# Altium PCB PATTERN-GENERATOR-NODE-PCB.PcbDoc (part 1 of 2)
Units mm, origin at the board's own origin, x right, y up, seen from the top; angles counter-clockwise.
Board outline 100.5 x 100.5 mm, 2 copper layers (Top Layer, Bottom Layer), stack 1.771 mm thick; 68 components, 36 nets, 239 pads, 2205 vias.
Unrouted connection lines stored in the file: 2.
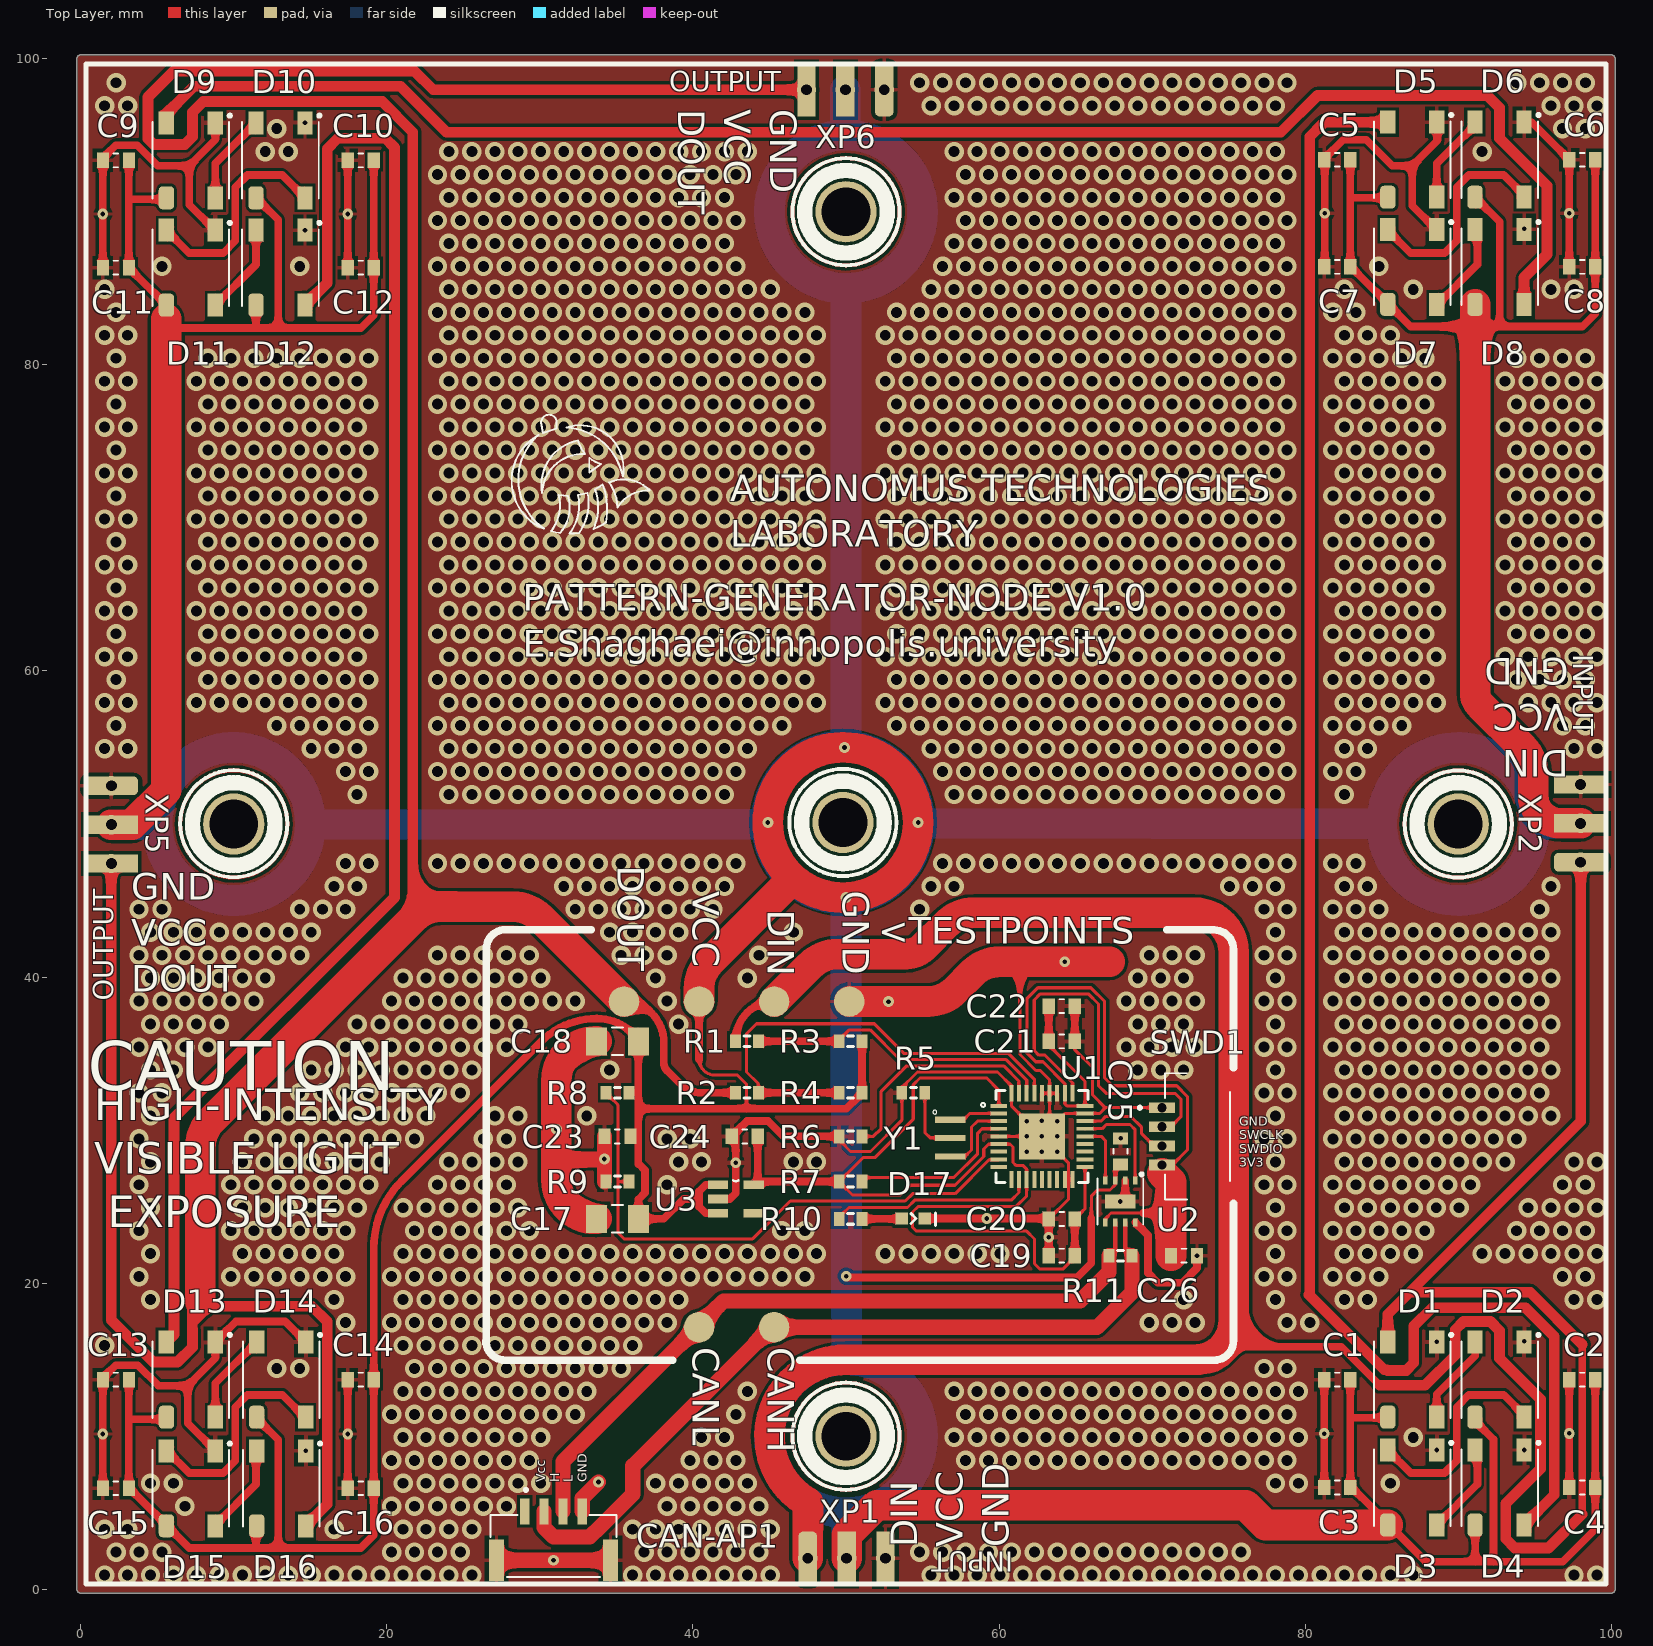
[diagram p0: Top Layer view]
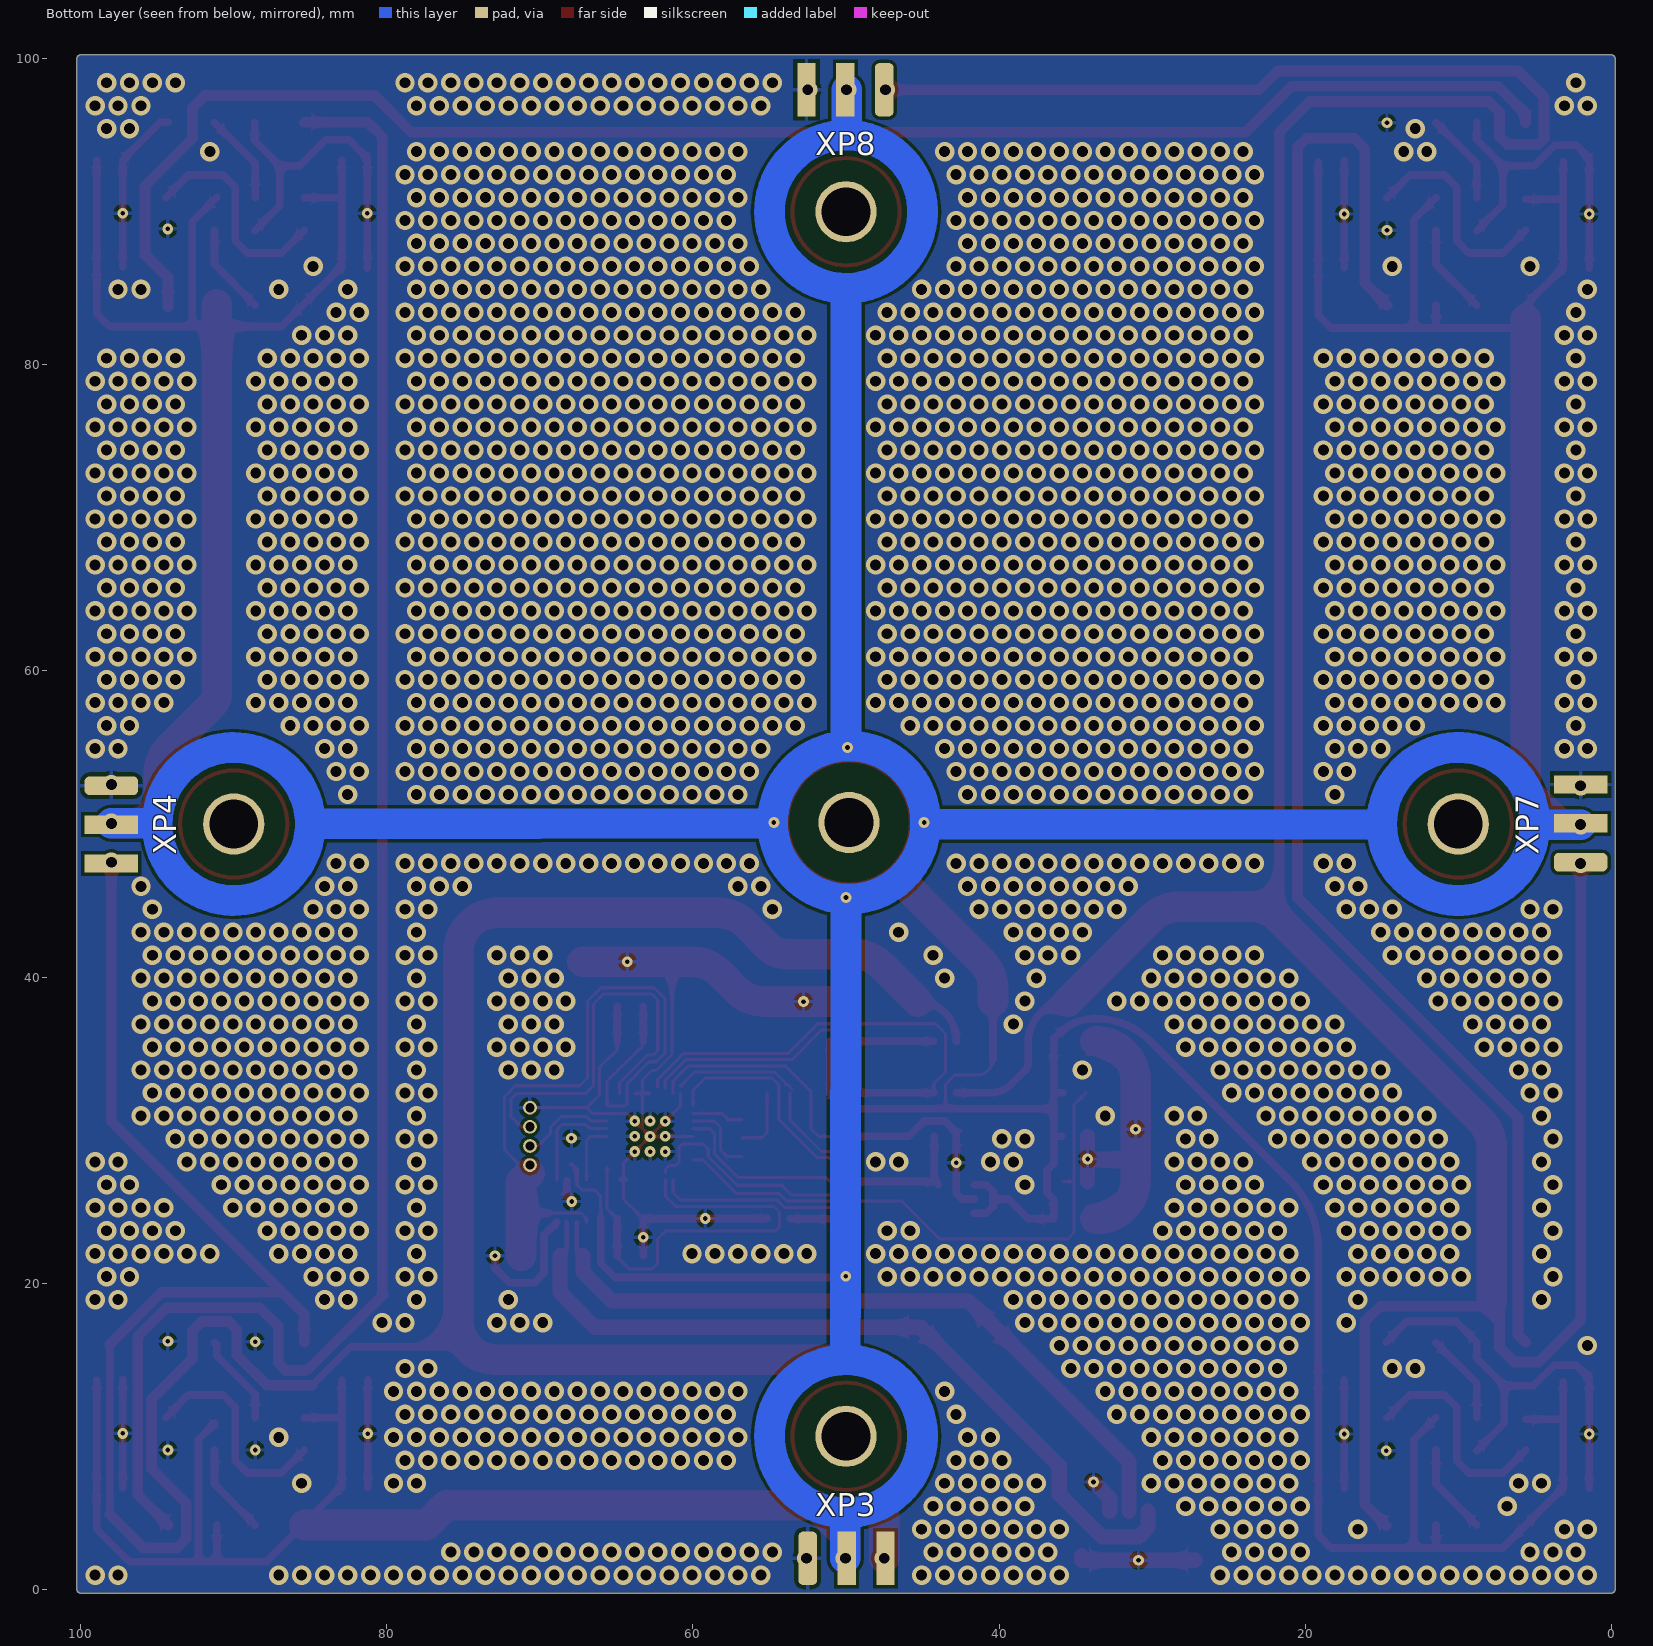
[diagram p1: Bottom Layer view, seen from below]
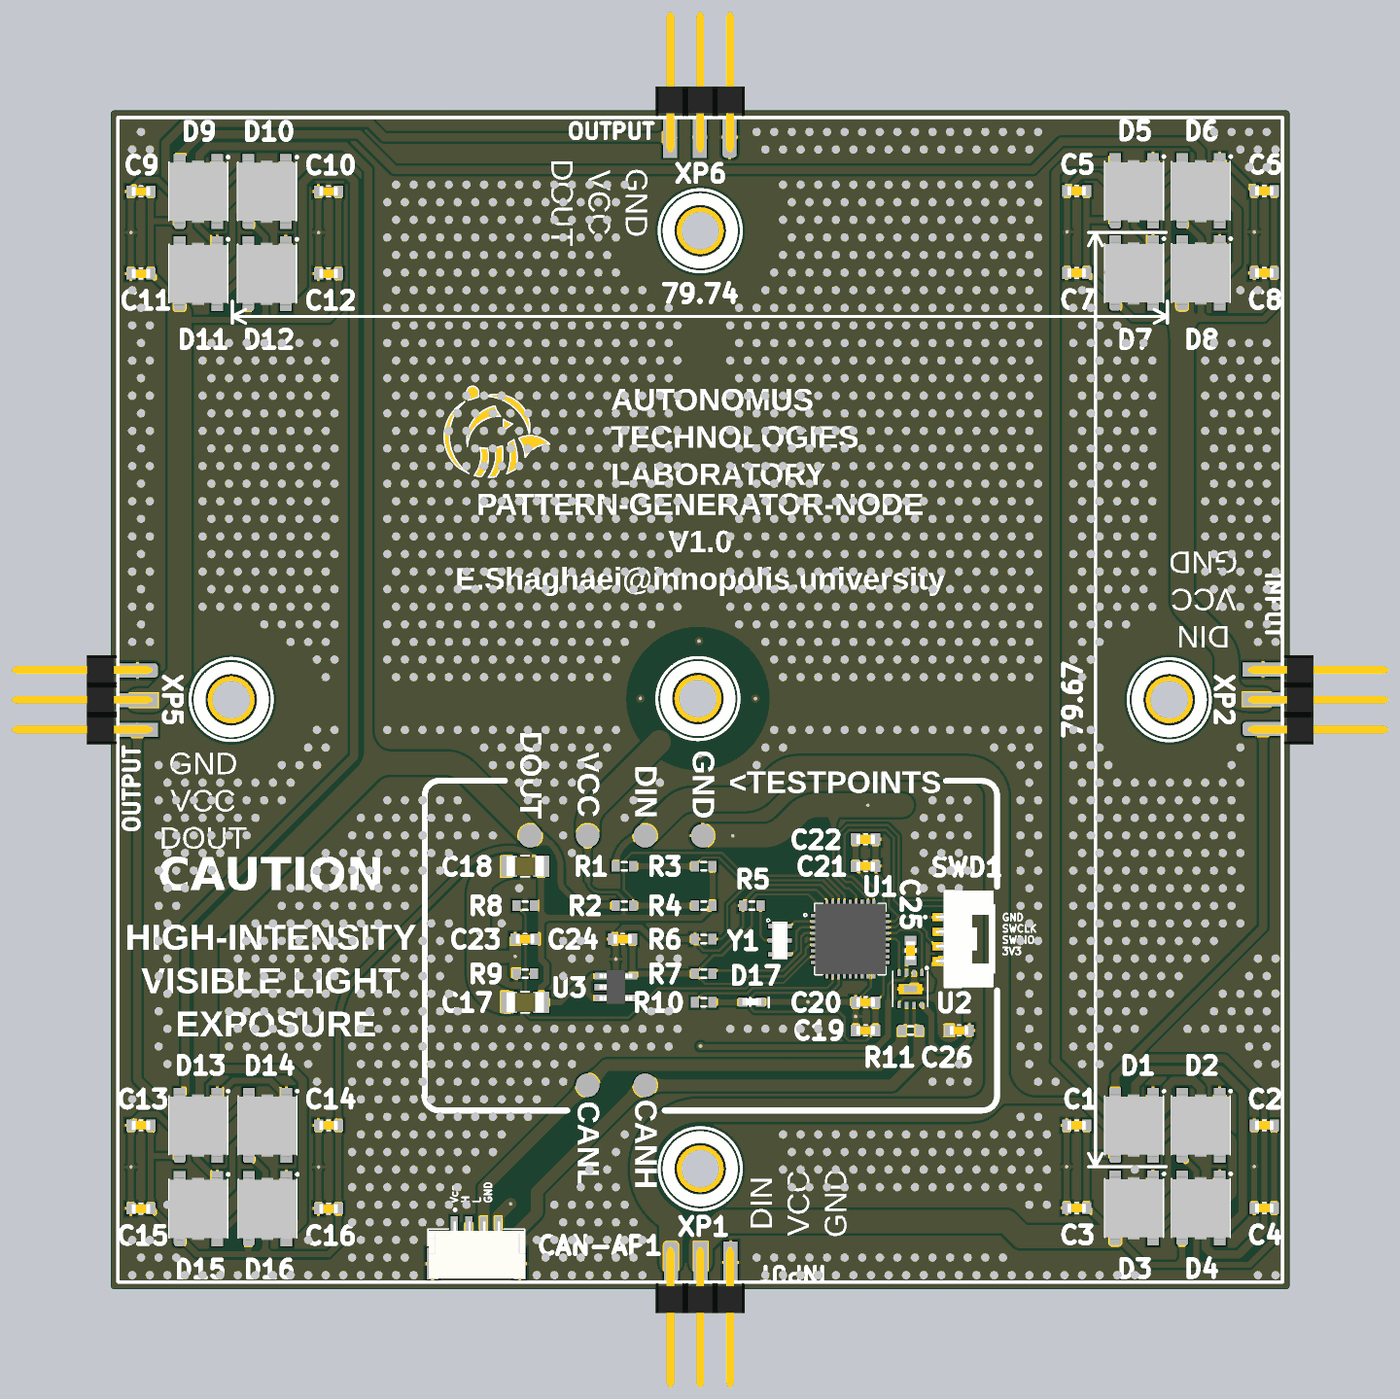
[diagram p3: 3D render of the assembled board from above, using the file's embedded part models]
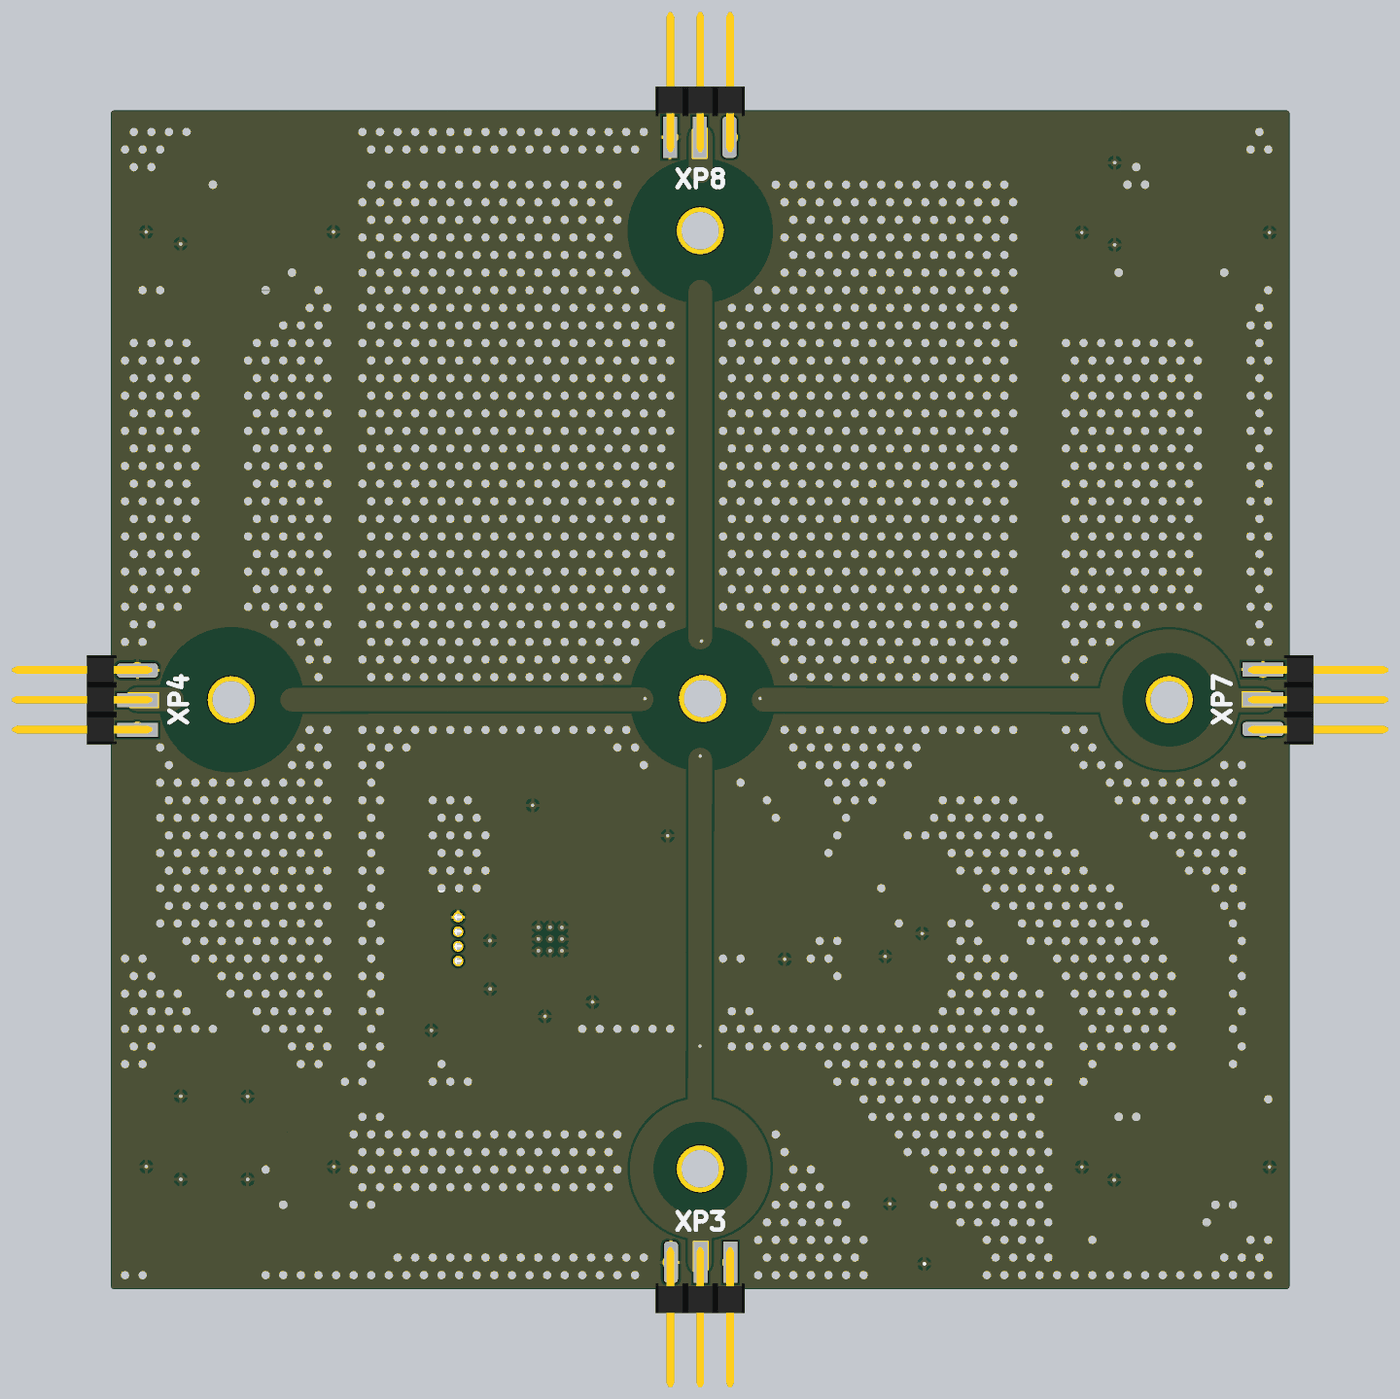
[diagram p4: 3D render of the assembled board from below, using the file's embedded part models]

## Layer stack, top to bottom
Top Solder: solder mask 0.0102, Solder Resist, Dk 3.5
Top Layer: signal copper 0.0356
Dielectric 1: dielectric 1.7, FR-4, Dk 4.8
Bottom Layer: signal copper 0.0356
Bottom Solder: solder mask 0.0102, Solder Resist, Dk 3.5

## Board outline
-0.25,0 ccw(c0,0) 0,-0.25 100,-0.25 ccw(c100,0) 100.25,0 100.25,100 ccw(c100,100) 100,100.25 0,100.25 ccw(c0,100) -0.25,100

## Design rules (kind name [scope] priority, off if disabled: settings)
Clearance [All] p1: gap=0.2 ignorepadtopadclearanceinfootprint=FALSE
PolygonConnect [All] p1: connectstyle=Relief reliefconductorwidth=0.254 reliefentries=4 polygonreliefangle="90 Angle" airgapwidth=0.254
RoutingVias [All] p1: holewidth=0.3 width=0.7 viastyle="Through Hole" minholewidth=0.3 minwidth=0.7 maxholewidth=1 maxwidth=1.5
SolderMaskExpansion [All] p1: expansion=0.102 istentingtop=FALSE
Width [All] p1: maxlimit=5 minlimit=0.17 preferedwidth=0.2
30 further rules are at their usual default settings.

## Components (designator, comment, footprint, x,y, rotation, side; value= is the part's Value field where it differs from the comment)
C1 "GX035C104MAT2-500" *CAPC1608X90 82.1,13.7 r180 top value=0.1u
C2 "GX035C104MAT2-500" *CAPC1608X90 98.1,13.7 r180 top value=0.1u
C3 "GX035C104MAT2-500" *CAPC1608X90 82.1,6.65 r180 top value=0.1u
C4 "GX035C104MAT2-500" *CAPC1608X90 98.1,6.65 r180 top value=0.1u
C5 "GX035C104MAT2-500" *CAPC1608X90 82.1,93.4 r180 top value=0.1u
C6 "GX035C104MAT2-500" *CAPC1608X90 98.1,93.4 r180 top value=0.1u
C7 "GX035C104MAT2-500" *CAPC1608X90 82.1,86.4 r180 top value=0.1u
C8 "GX035C104MAT2-500" *CAPC1608X90 98.1,86.4 r180 top value=0.1u
C9 "GX035C104MAT2-500" *CAPC1608X90 2.3,93.356 r180 top value=0.1u
C10 "GX035C104MAT2-500" *CAPC1608X90 18.3,93.356 r180 top value=0.1u
C11 "GX035C104MAT2-500" *CAPC1608X90 2.3,86.35 r180 top value=0.1u
C12 "GX035C104MAT2-500" *CAPC1608X90 18.3,86.35 r180 top value=0.1u
C13 "GX035C104MAT2-500" *CAPC1608X90 2.3,13.7 r180 top value=0.1u
C14 "GX035C104MAT2-500" *CAPC1608X90 18.3,13.7 r180 top value=0.1u
C15 "GX035C104MAT2-500" *CAPC1608X90 2.3,6.6 r180 top value=0.1u
C16 "GX035C104MAT2-500" *CAPC1608X90 18.3,6.6 r180 top value=0.1u
C17 "GRM31CR61A476KE15L" *CAPC3216X125N 35.069,24.2 r0 top value=47u
C18 "GRM31CR61A476KE15L" *CAPC3216X125N 35.069,35.8 r0 top value=47u
C19 "GX035C104MAT2-500" *CAPC1608X90 64.1,21.8 r180 top value=0.1u
C20 "GX035C104MAT2-500" *CAPC1608X90 64.1,24.2 r180 top value=0.1u
C21 "GX035C104MAT2-500" *CAPC1608X90 64.1,35.8 r0 top value=0.1u
C22 "GX035C104MAT2-500" *CAPC1608X90 64.1,38.1 r0 top value=0.1u
C23 "GX035C104MAT2-500" *CAPC1608X90 35.069,29.59 r180 top value=0.1u
C24 "GX035C104MAT2-500" *CAPC1608X90 43.379,29.59 r180 top value=0.1u
C25 "GX035C104MAT2-500" *CAPC1608X90 67.937,28.61 r90 top value=0.1u
C26 "GX035C104MAT2-500" *CAPC1608X90 72.082,21.8 r0 top value=0.1u
CAN-AP1 "SM04B-GHS-TB(LF)(SN)-" JST_SM04B-GHS-TB(LF)(SN)- 30.89,2.82 r0 top
D1 "WS2812" LED_WS2812 87,13.7 r90 top
D2 "WS2812" LED_WS2812 92.7,13.7 r90 top
D3 "WS2812" LED_WS2812 87,6.65 r90 top
D4 "WS2812" LED_WS2812 92.7,6.65 r90 top
D5 "WS2812" LED_WS2812 87,93.4 r90 top
D6 "WS2812" LED_WS2812 92.7,93.4 r90 top
D7 "WS2812" LED_WS2812 87,86.4 r90 top
D8 "WS2812" LED_WS2812 92.7,86.4 r90 top
D9 "WS2812" LED_WS2812 7.2,93.356 r90 top
D10 "WS2812" LED_WS2812 13.053,93.356 r90 top
D11 "WS2812" LED_WS2812 7.2,86.35 r90 top
D12 "WS2812" LED_WS2812 13.053,86.35 r90 top
D13 "WS2812" LED_WS2812 7.2,13.7 r90 top
D14 "WS2812" LED_WS2812 13.1,13.7 r90 top
D15 "WS2812" LED_WS2812 7.2,6.6 r90 top
D16 "WS2812" LED_WS2812 13.1,6.6 r90 top
D17 "0603-LED-BLUE" *LEDM1608X80_LTE-C1906R-14(Primary) 54.4,24.224 r180 top
R1 "Res3" J1-0603 43.529,35.8 r180 top value=330
R2 "Res3" J1-0603 43.529,32.44 r180 top value=330
R3 "Res3" J1-0603 50.3,35.8 r0 top value=10K
R4 "Res3" J1-0603 50.3,32.44 r0 top value=10K
R5 "RC0603FR-0710KL" J1-0603 54.4,32.44 r0 top value=0R
R6 "RC0603FR-0710KL" J1-0603 50.3,29.59 r0 top value=10k
R7 "RC0603FR-0710KL" J1-0603 50.3,26.64 r0 top value=10k
R8 "RC0603FR-0710KL" J1-0603 35.069,32.44 r0 top value=10k
R9 "RC0603FR-0710KL" J1-0603 35.069,26.64 r0 top value=10k
R10 "Res3" J1-0603 50.3,24.2 r0 top value=330
R11 "Res3" J1-0603 67.937,21.8 r0 top value=120
SWD1 "BM04B-GHS-TBT(LF)(SN)(N)" JST_BM04B-GHS-holes 74,29.59 r90 top
U1 "STM32F103T8" *QFN50P600X600X100-37N 62.8,29.59 r0 top
U2 "TJA1042" SOT782-1 67.92,25.334 r180 top
U3 "SPX3819M5-L-3-3/TR" *SOT95P280X145-5N 42.8,25.5 r0 top value=3V3
XP1 "Header 3" "HDR Side 3 pin" 50.04,2.028 r0 top
XP2 "Header 3" "HDR Side 3 pin" 97.998,50.04 r90 top
XP3 "Header 3" "HDR Side 3 pin" 49.96,2.028 r180 bottom
XP4 "Header 3" "HDR Side 3 pin" 97.998,49.96 r270 bottom
XP5 "Header 3" "HDR Side 3 pin" 2.002,49.96 r270 top
XP6 "Header 3" "HDR Side 3 pin" 49.96,97.972 r180 top
XP7 "Header 3" "HDR Side 3 pin" 2.002,50.04 r90 bottom
XP8 "Header 3" "HDR Side 3 pin" 50.04,97.972 r0 bottom
Y1 "CSTCE8M00G55-R0" *OSC_CSTCE8M00G55-R0 56.8,29.477 r270 top

## Footprints (in the part's own frame and the unit in brackets; to place one, negate y for a bottom-side part, rotate by r counter-clockwise, add the part's x,y. Pads: shape width x height; smd on the part's side, far side on the other; paste and mask are expansions set on the pad)
*CAPC1608X90 [mm]
  rect 0.8x1 smd: 1(-0.85,0) 2(0.85,0)
  silkscreen extent -0.15,-0.45 0.15,0.45, body extent -0.8,-0.4 0.8,0.41, height 0.88
*CAPC3216X125N [mm]
  rect 1.38x1.82 smd: 1(-1.369,0) 2(1.369,0)
  silkscreen extent -0.36,-0.9 0.36,0.9, body extent -1.6,-0.87 1.6,0.87, height 1.71
*LEDM1608X80_LTE-C1906R-14(Primary) [mm]
  rect 0.8x0.8 smd: A(0.75,0) C(-0.75,0)
  silkscreen extent -1.45,-0.38 0.16,0.45, body extent -0.8,-0.3 0.8,0.3, height 1.15
*OSC_CSTCE8M00G55-R0 [mm]
  rect 0.4x2 smd: 1(-1.2,0) 2(0,0) 3(1.2,0)
  silkscreen extent -1.83,-1.13 -1.57,-0.87, body extent -1.6,-0.65 1.6,0.65, height 1
*QFN50P600X600X100-37N [mm]
  rect 1.08x0.26 smd: 1(-2.815,2) 2(-2.815,1.5) 3(-2.815,1) 4(-2.815,0.5) 5(-2.815,0) 6(-2.815,-0.5) 7(-2.815,-1) 8(-2.815,-1.5) 9(-2.815,-2) 19(2.815,-2) 20(2.815,-1.5) 21(2.815,-1) 22(2.815,-0.5) 23(2.815,0) 24(2.815,0.5) 25(2.815,1) 26(2.815,1.5) 27(2.815,2)
  rect 0.26x1.08 smd: 10(-2,-2.815) 11(-1.5,-2.815) 12(-1,-2.815) 13(-0.5,-2.815) 14(0,-2.815) 15(0.5,-2.815) 16(1,-2.815) 17(1.5,-2.815) 18(2,-2.815) 28(2,2.815) 29(1.5,2.815) 30(1,2.815) 31(0.5,2.815) 32(0,2.815) 33(-0.5,2.815) 34(-1,2.815) 35(-1.5,2.815) 36(-2,2.815)
  rect 3x3 smd: ""(0,0)
  silkscreen extent -3.97,-3 3,3, body extent -3,-3 3,3, height 1
*SOT95P280X145-5N [mil]
  rect 52x22 smd: 1(-46,37) 2(-46,0) 3(-46,-37) 4(46,-37) 5(46,37)
  silkscreen extent -7,46 7,48, body extent -55,-57 55,57, height 57
"HDR Side 3 pin" [mm]
  rrect50% 1.2x3.5 smd: 1(-2.54,0)
  rect 1.2x3.5 smd: 2(0,0) 3(2.54,0)
  body extent -3.85,-10.67 3.77,1.27, height 1.57
J1-0603 [mm] "Chip Resistor, Body 1.6x0.8mm, IPC High Density"
  rect 0.7x0.9 smd: 1(-0.75,0) 2(0.75,0)
  silkscreen extent -0.2,-0.35 0.2,0.35, body extent -0.85,-0.48 0.85,0.48, height 0.9
JST_BM04B-GHS-holes [mm]
  rect 0.7x1.7 / inner rect 0.6x1.7 / far side round 0.9 hole 0.6: 1(1.875,3.35) 2(0.625,3.35) 3(-0.625,3.35) 4(-1.875,3.35)
  silkscreen extent -4.13,-1.1 4.13,4.9, body extent -4.12,-1.02 4.12,3.93, height 4.15
JST_SM04B-GHS-TB(LF)(SN)- [mm]
  rect 0.6x1.7 smd: 1(-1.875,2.275) 2(-0.625,2.275) 3(0.625,2.275) 4(1.875,2.275)
  rect 1x2.7 smd: SH1(-3.725,-0.925) SH2(3.725,-0.925)
  silkscreen extent -4.13,-2.02 4.13,3.77, body extent -4.06,-2.16 4.19,2.69, height 4.35
LED_WS2812 [mm]
  rrect50% 1.5x1 smd: 1(-2.45,1.6)
  rect 1.5x1 smd: 2(-2.45,-1.6) 3(2.45,-1.6) 4(2.45,1.6)
  silkscreen extent -2.5,-2.64 3.02,2.5, body extent -2.7,-2.45 2.65,2.5, height 1.5
SOT782-1 [mm]
  rect 0.3x0.525 smd: 1(-0.975,-1.362) 2(-0.325,-1.362) 3(0.325,-1.362) 4(0.975,-1.362) 5(0.975,1.362) 6(0.325,1.362) 7(-0.325,1.362) 8(-0.975,1.362)
  rect 2x0.9 smd paste-2: P$9(0,0)
  silkscreen extent -1.5,-1.88 1.5,1.5, body extent -1.52,-1.52 1.52,1.52, height 0.85

## Part data
C1 C2 C3 C4 C5 C6 C7 C8 C9 C10 C11 C12 C13 C14 C15 C16 C19 C20 C21 C22 C23 C24 C25 C26: "Cap Thin Film 0.1uf 50v 0603", Package="0603 AVX", MF=AVX, Pacage Metric=1608, SnapEDA_Link=https://www.snapeda.com/parts/GX035C104MAT2-500/AVX/view-part/?ref=snap, Type=SMD
  C1 C2 C3 C4 C5 C6 C7 C8 C9 C10 C11 C12 C13 C14 C15 C16 C19 C20 C21 C22 C25 C26: MP="GX035C104MAT2-500 or CL10B104JB8NNNC"
  C23 C24: MP=GX035C104MAT2-500
C17 C18: "Multilayer Ceramic Capacitor, GRM Series, 47 - F, - 10%, X5R, 10 V, 1206 [3216 Metric]", Package="1206 Murata Electronics", MF="Murata Electronics", MP=GRM31CR61A476KE15L, SnapEDA_Link=https://www.snapeda.com/parts/GRM31CR61A476KE15L/Murata%20Electronics%20North%20America/view-part/?ref=snap, Type=SMD
CAN-AP1: "Connector Header Surface Mount, Right Angle 4 position 0.049 _1.25mm_", Package=None, ChipDip_Link=https://www.chipdip.ru/product/sm04b-ghs-tb-lf-sn-gh-1.25mm-header-side-ent, HelpURL=http://www.farnell.com/datasheets/2082975.pdf, MF="JST Sales", MP=SM04B-GHS-TB(LF)(SN), SnapEDA_Link=https://www.snapeda.com/parts/SM04B-GHS-TB%28LF%29%28SN%29-/JST%20Sales%20America%20Inc./view-part/2759740/?ref=snap, System=Connector
D1 D2 D3 D4 D5 D6 D7 D8 D9 D10 D11 D12 D13 D14 D15 D16: "Addressable Lighting - 5 LED Discrete Serial _Shift Register_ Red, Green, Blue _RGB_ 5.00mm Dia", Package="SparkFun Electronics", Availability=Unavailable, ChipDip_Link=https://www.chipdip.ru/product/ws2812b, HelpURL=https://static.chipdip.ru/lib/554/DOC001554925.pdf, MF="SparkFun Electronics", MP=WS2812, Price=None, SnapEDA_Link=https://www.snapeda.com/parts/WS2812/SparkFun%20Electronics/view-part/106391/?ref=snap
D17: library part LTE-C1906R-14, "LED IrLED Chip LED 2-Pin SMD T/R", Package="0603 Lite-On", MP=0603-LED-BLUE, SnapEDA_Link=https://www.snapeda.com/parts/LTE-C1906R-14/Lite-On%20Inc./view-part/?ref=snap, Type=SMD
R1 R2 R3 R4 R10: "Resistor", Package=R0603, Pacage Metric=1608, Type=SMD
  R1 R2 R3 R4: ChipDip_Link=https://www.chipdip.ru/product0/9000079736, HelpURL=https://www.chipdip.ru/product0/9000079736, MP="4.7K 1% 0603"
  R10: ChipDip_Link=https://www.chipdip.ru/product0/9000079628, HelpURL=https://www.chipdip.ru/product0/9000079628, MP=RC0603FR-07330RL
R5 R6 R7 R8 R9: "10 kOhms 1 0.1 W 1 10 W Chip Resistor 0603 1608 Metric Thick Film", Package=R0603, ChipDip_Link=https://www.chipdip.ru/product0/9000079736, HelpURL=https://www.chipdip.ru/product0/9000079736, MF="Yageo or NXP", MP="10K 1% 0603", Pacage Metric=1608, SnapEDA_Link=https://www.snapeda.com/parts/RC0603FR-0710KL/Yageo/view-part/?ref=dk&t=RC0603FR-0710KL&con_ref=None, Type=SMD
R11: "120 Ohms 1 0.1 W 1 10 W Chip Resistor 0603 1608 Metric Thick Film", Package=R0603, ChipDip_Link=https://www.chipdip.ru/product0/9000079618, HelpURL=https://www.chipdip.ru/product0/9000079618, MP=RC0603FR-07120RL, Pacage Metric=1608, Type=SMD
SWD1: "Conn Shrouded Header HDR 4 POS 1.25mm Solder ST SMD Reel", Package=None, Instructions="Do not install", MF="JST Sales", MP=SM04B-GHS-TB(LF)(SN), SnapEDA_Link=https://www.snapeda.com/parts/BM04B-GHS-TBT%28LF%29%28SN%29%28N%29/JST%20Sales%20America%20Inc./view-part/?ref=snap, System=Connector, Type=SMD
U1: "STM32F103T8U6, Микроконтроллер 32BIT ARM 64K FLASH [VFQFPN-36]", Package=VFQFPN-36, ChipDip_Link=https://www.chipdip.ru/product/stm32f103t8u6-2, HelpURL=http://www.st.com/stonline/products/literature/ds/13587.pdf, MF=STM, MP=STM32F103T8U6, SnapEDA_Link=https://www.snapeda.com/parts/STM32F103T8U6TR/STMicroelectronics/view-part/?ref=search&t=STM32F103T8U6, Type=SMD
U2: "1/1 Transceiver Half CANbus 8-SO", Package="VDFN-8 NXP USA", ChipDip_Link=https://www.chipdip.ru/product1/8002840332, HelpURL=https://static.chipdip.ru/lib/583/DOC001583059.pdf, MF="NXP USA", MP=TJA1042, SnapEDA_Link=https://www.snapeda.com/parts/TJA1042/NXP%20USA%20Inc./view-part/900919/?ref=snap, Type=SMD
U3: library part SPX3819M5-L, "Low Dropout Voltage Regulator, Adjustable 0.5A, В±1%, 2.5 to 16 Vin, 5-Pin SOT-23", Package="SOT-23-5 Exar", ChipDip_Link=https://www.chipdip.ru/product1/8003455237, HelpURL=http://www.farnell.com/datasheets/2614478.pdf, MF="MaxLinear, Inc.", MP=SPX3819M5-L-3-3/TR, SnapEDA_Link=https://www.snapeda.com/parts/SPX3819M5-L/MaxLinear%2C%20Inc./view-part/?ref=snap, Type=SMD
XP1 XP2 XP3 XP4 XP5 XP6 XP7 XP8: "Header, 3-Pin", LatestRevisionDate=17-Jul-2002, LatestRevisionNote="Re-released for DXP Platform.", Publisher="Altium Limited"
Y1: "Ceramic Resonator 8MHz ??0.5% _Tol_ ??0.2% _Stability_ 33pF 40Ohm 3-Pin CSMD T/R", Package="SMD-3 Murata", ChipDip_Link=https://www.chipdip.ru/product1/8001783721, HelpURL=https://www.murata.com/en-eu/api/pdfdownloadapi?cate=&partno=CSTCE8M00G55-R0, MF=Murata, MP=CSTCE8M00G55-R0, SnapEDA_Link=https://www.snapeda.com/parts/CSTCE8M00G55-R0/Murata%20Electronics%20North%20America/view-part/?ref=snap, Type=SMD

## Free pads (board coordinates)
  round 2 smd: 5(45.3,38.4) 6(35.498,38.4) 8(40.399,38.4) 9(50.21,38.4) 10(45.3,17.12) 11(40.399,17.12)
  round 4 hole 3.2: ""(10,50) ""(49.8,50.1) ""(50,10) ""(50,90) ""(90,50)

## Via types
v1: diameter 1.27, hole 0.711, Top Layer to Bottom Layer, tented both sides, 2151 vias
v2: diameter 0.7, hole 0.3, Top Layer to Bottom Layer, tented top, 42 vias
v3: diameter 1.27, hole 0.711, Top Layer to Bottom Layer, tented top, 12 vias

## Nets (pads, with @x,y where several pads share a name; then routed paths per layer and width w, separated by ;. In a path a pad name is that pad's centre, name@x,y a point inside that pad or via, vN(x,y) a via of type N, cw(c..) or ccw(c..) an arc to the next point about the centre after c; other vN are vias at no path point)
3.3: C19.1 C20.1 C21.1 C22.1 C24.1 C26.1 R7.1 SWD1.4 U1.1 U1.6 U1.12 U1.19 U1.27 U1.29 U2.5 U3.5 | length 119.2
  Top Layer w0.2: U1.1@59.985,31.59 59.985,32.615 59.2,33.4 54.833,33.4 54.395,32.962 54.395,30.716 51.879,28.2 51.11,28.2 R7.1@49.55,26.64 50.423,25.767 53.567,25.767 54.2,26.4 57.117,26.4 59,28.283 59,28.764 59.326,29.09 U1.6@59.985,29.09 60.718,29.09 60.915,28.893 60.915,27.885 61.1,27.7 61.548,27.7 61.804,27.444 U1.12@61.804,27.226 ; U1.12@61.8,26.775 61.8,25.7 61.1,25 54.7,25 54.35,24.65 54.35,23.65 54.6,23.4 61.8,23.4 62.312,22.888 62.312,21.278 62.67,20.92 64.166,20.92 64.95,21.703 C19.1@64.95,21.8 ; C21.1@63.25,35.8 63.25,35.55 65.615,33.185 U1.27@65.615,31.59 65.605,31.6 65.57,31.565 64.459,31.565 64.3,31.724 U1.29@64.3,32.405 64.3,33.034 62.9,34.434 62.867,34.467 62.399,34.467 61.818,35.047 61.818,38.584 62.534,39.3 66,39.3 66.9,38.4 66.9,33.4 67.4,32.9 71.6,32.9 72.3,32.2 72.3,28.7 71.315,27.715 SWD1.4@70.65,27.715 SWD1.4@70.525,27.59 ; C20.1@64.95,24.2 65.615,24.865 U1.19@65.615,27.59 ; U2.5@66.945,23.972 66.945,24.216 67.313,24.584 69.42,24.584
  Top Layer w0.5: U3.5@43.968,26.44 U3.5@44.169,26.64 ; C24.1@44.229,29.59 44.229,26.7 U3.5@44.169,26.64 ; R7.1@49.55,26.64 U3.5@44.169,26.64 ; C21.1@63.25,35.8 C22.1@63.25,38.1 ; C19.1@64.95,21.8 C20.1@64.95,24.2 ; 69.42,24.584 69.426,24.579 71.232,24.579
  Top Layer w2: 70.65,27.19 71.232,26.608 71.232,24.579 C26.1@71.232,21.8
ADC_5V: R8.1 R9.2 U1.8 | length 37.4
  Top Layer w0.2: R8.1@34.319,32.44 35.041,31.718 cw(c34.899,31.577) 35.099,31.578 35.1,27.03 35.1,26.813 cw(c34.319,26.64) 35.1,26.467 35.1,26.219 35.101,23.383 ccw(c35.301,23.382) 35.159,23.241 35.5,22.9 43.9,22.9 46.367,25.367 53.867,25.367 54.353,25.853 57.135,25.853 59.343,28.06 59.955,28.06 U1.8@59.985,28.09 ; 35.119,26.619 cw(c35.209,26.44) 35.209,26.64 R9.2@35.819,26.64
BOOT0: R6.2 U1.35 | length 14.8
  Top Layer w0.2: R6.2@51.05,29.59 51.79,29.59 52.3,30.1 52.3,32.534 53.966,34.2 60.3,34.2 61.3,33.2 U1.35@61.3,32.405
CAN_H: CAN-AP1.2 pad.10 R11.2 U2.7 | length 52.2
  Top Layer w0.3: U2.7@68.245,23.972 68.245,22.242 R11.2@68.687,21.8
  Top Layer w1: CAN-AP1.2@30.265,5.095 30.265,4.04 30.89,3.415 33.25,3.415 33.962,4.108 36.07,6.216 36.07,8.07 45.12,17.12 66.4,17.12 68.687,19.407 R11.2@68.687,21.8
CAN_L: CAN-AP1.3 pad.11 R11.1 U2.6 | length 47.5
  Top Layer w0.3: R11.1@67.187,21.8 67.595,22.208 U2.6@67.595,23.972
  Top Layer w1: CAN-AP1.3@31.515,5.095 31.515,8.355 40.34,17.18 41.993,18.833 65.303,18.833 67.187,20.717 R11.1@67.187,21.8
CAN_RXD: U1.23 U2.4 | length 4.1
  Top Layer w0.2: U1.23@65.615,29.59 66.679,29.59 66.945,29.324 U2.4@66.945,26.697
CAN_TXD: U1.24 U2.1 | length 6.9
  Top Layer w0.2: U1.24@65.615,30.09 65.621,30.096 66.737,30.096 67.013,30.372 68.553,30.372 68.895,30.031 U2.1@68.895,26.697
DIN: D1.4 pad.5 R1.2 XP1.1 XP2.1 XP3.3 XP4.3 | length 208.7
  Top Layer w0.5: R1.2@42.779,35.8 cw(c45.468,35.8) 43.567,37.702 cw(c45.252,36.016) 45.252,38.4 pad.5@45.3,38.4 ; 75.254,15.837 82.351,15.837 84.863,13.325 ; 98.1,4.9 98.1,16
  Top Layer w0.7: 84.863,13.325 87.823,13.325 89.8,15.301 89.8,16.953 90.347,17.5 92.1,17.5 92.7,16.9 92.7,15.1 95.378,12.422 95.378,7.878 93.1,5.6 93.1,3.3 93.7,2.7 95.9,2.7 98.1,4.9 ; D1.4@85.4,16.15 85.4,17.973 98,30.573 98,47.499 v3(97.998,47.5) ; 86.9,19.4 94.7,19.4 98.1,16
  Top Layer w2: pad.5@45.3,38.4 47.656,40.756 cw(c49.452,38.96) 49.452,41.5 53.893,41.5 ccw(c53.893,43.207) 55.1,42 56.556,43.456 cw(c58.352,41.66) 58.352,44.2 72.78,44.2 cw(c72.78,41.66) 75.32,41.66 75.32,17.54 cw(c72.78,17.54) 72.78,15 50.04,15 ccw(c50,10) 49.971,15 ccw(c50,10) 47.536,5.649 ; v3(47.5,2.028) 47.515,5.612
DOUT: D16.2 pad.6 R2.2 XP5.3 XP6.3 XP7.1 XP8.1 | length 240.1
  Top Layer w0.5: pad.6@35.498,38.4 cw(c35.498,35.861) 37.293,37.656 cw(c35.345,35.708) 38.1,35.708 38.1,34.383 ccw(c38.783,34.383) 38.3,33.9 39.2,33 ccw(c40.552,34.352) 40.552,32.44 R2.2@42.779,32.44
  Top Layer w0.7: v3(2.002,47.42) 2.002,17.598 4.75,14.85 6.328,14.85 7.3,15.822 7.3,17 ; 7.294,17 7.294,17.429 ; 7.294,18.591 7.294,17.429 ; D16.2@14.7,4.15 16.1,5.55 16.1,17.5 15.1,18.5 8.365,18.5 7.294,17.429 ; 20.868,43.86 20.956,43.948 ccw(c19.16,45.744) 21.7,45.744 21.7,95.2 19.7,97.2 8,97.2 7.3,96.5 7.3,94.9 6.8,94.4 4.774,94.4 4.4,94.774 4.4,97.5 6.1,99.2 21.8,99.2 23.028,97.972 v3(47.42,97.972)
  Top Layer w2: 7.816,18.787 7.816,28.864 cw(c10.356,28.864) 8.56,30.66 21.402,43.502 21.756,43.856 cw(c23.552,42.06) 23.552,44.6 28.246,44.6 cw(c28.246,42.06) 30.042,43.856 pad.6@35.498,38.4